# Allegro board shepard.brd
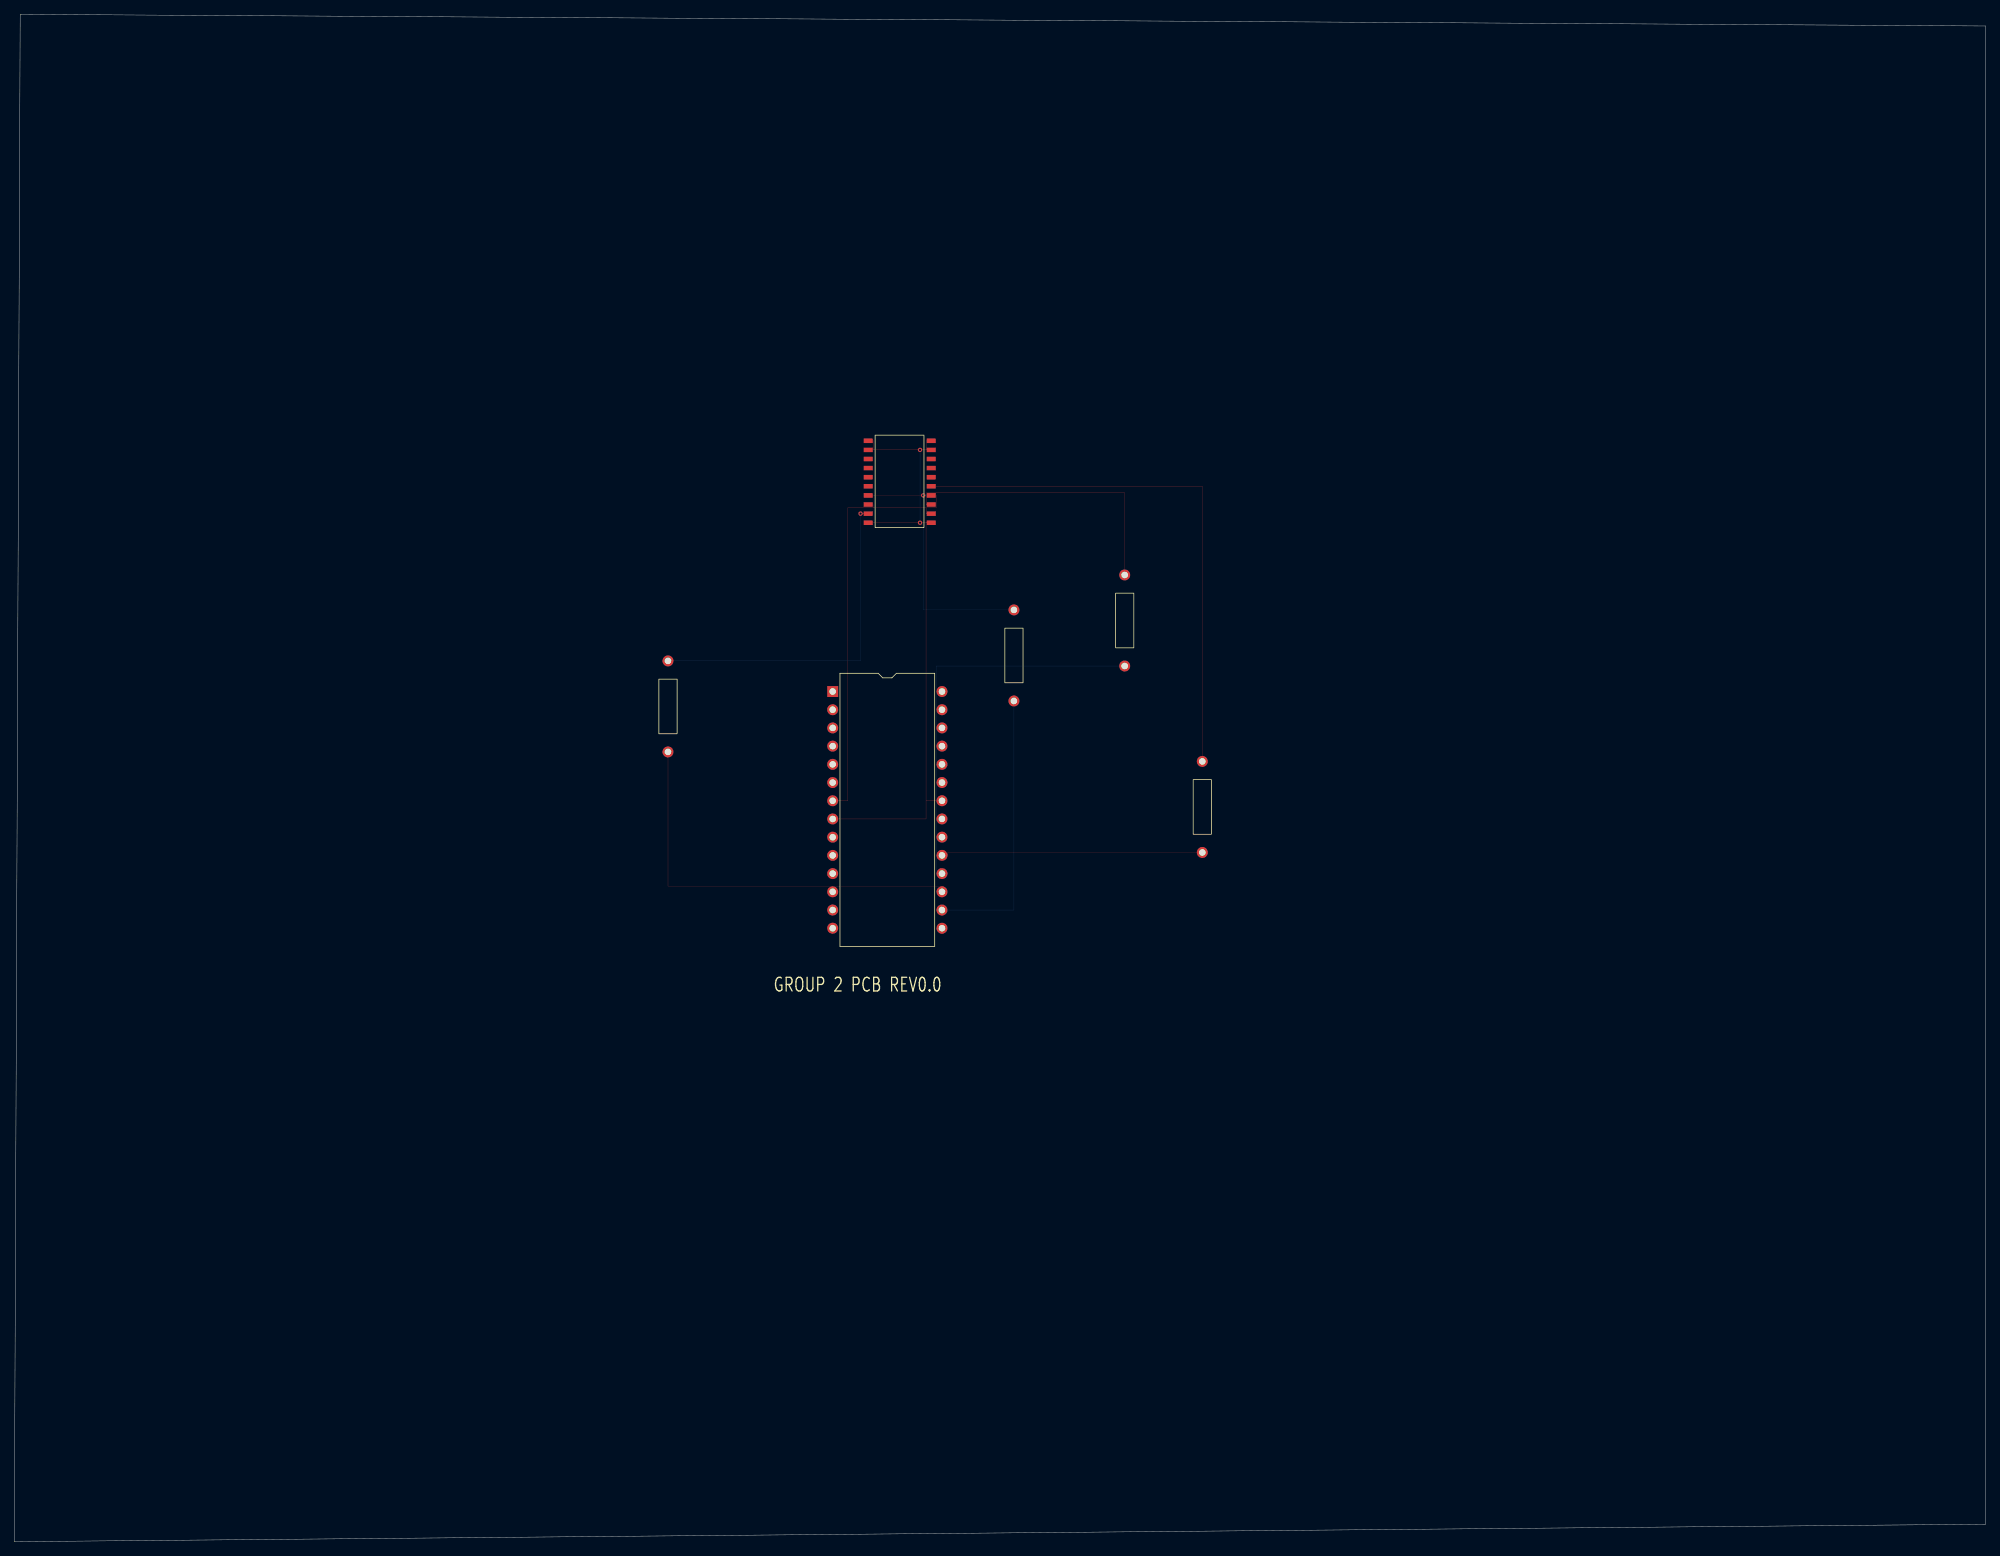
[diagram p0: board, top side]
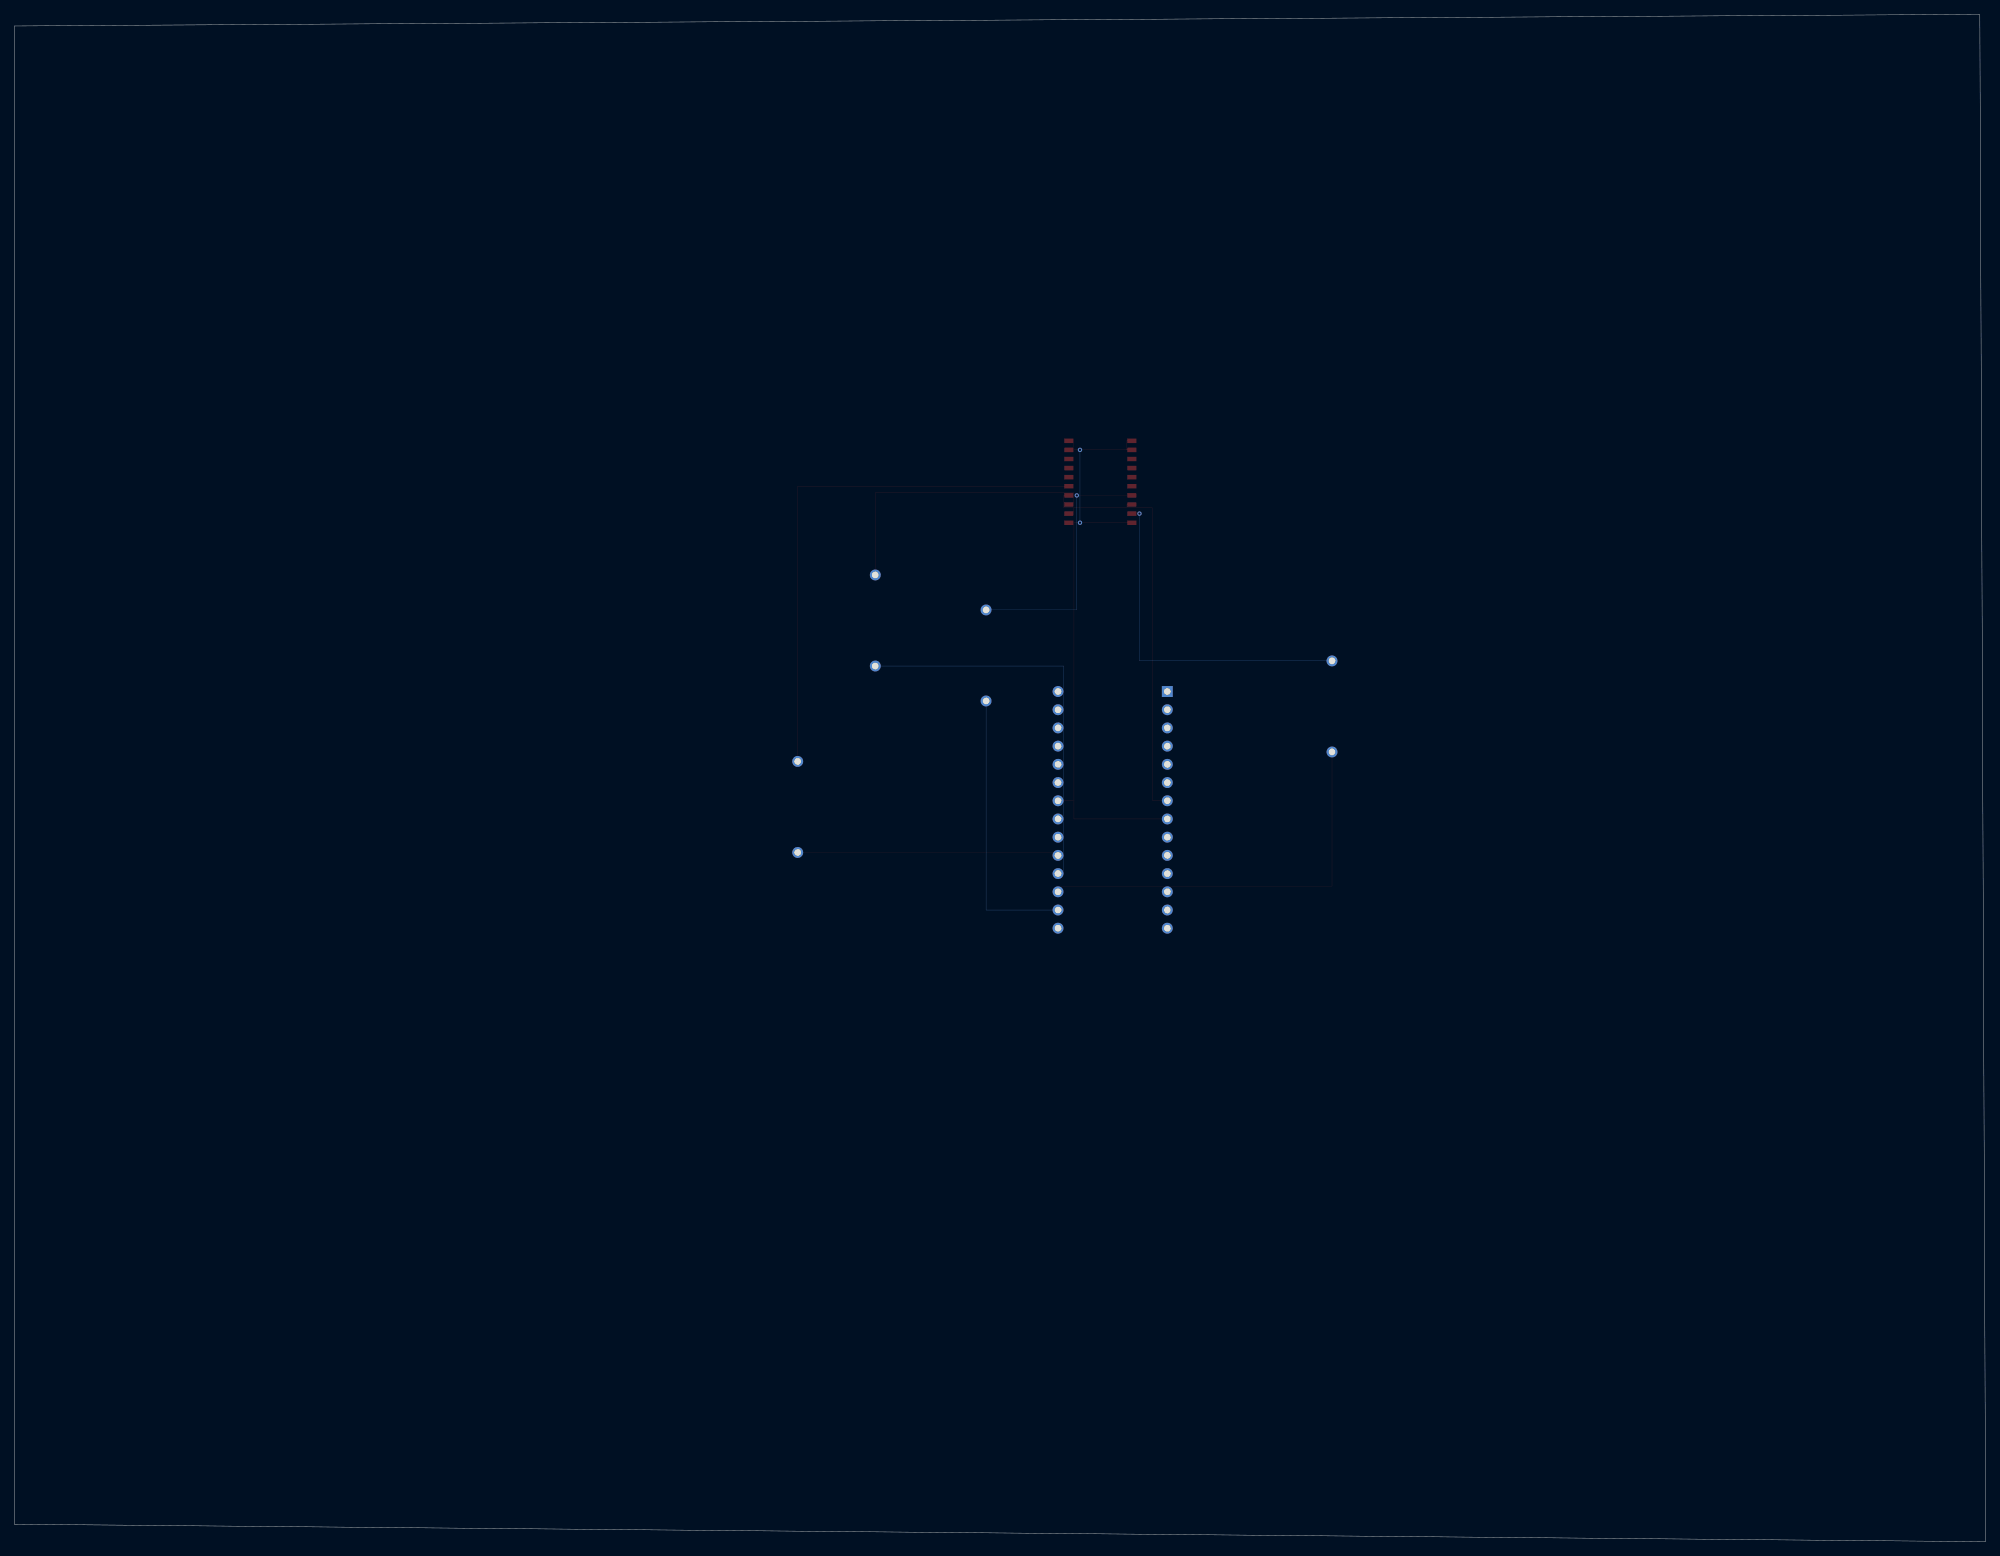
[diagram p1: board, bottom side, seen from below]

Outline 274.85 x 213.06 mm; copper layers: TOP, BOTTOM. Coordinates in mm from the lower left corner of the outline.
Outline path: 0,0 274.85,2.44 274.85,211.43 0.81,213.06 0,0

## Placement (name value [footprint] x y rotation side)
J1  DIPSOC-14x2  [DIP28]  114.1 118.59 0 top
R9  5K  [RES500]  139.37 129.97 0 top
R10  5K  [RES500]  91.14 122.86 0 top
R11  5K  [RES500]  154.81 134.85 0 top
R12  5K  [RES500]  165.63 108.84 0 top
U2  L298/SO  [SOIC20]  119.05 153.57 0 top

## Library data of the parts
J1 = DIPSOC-14x2: Tolerance: ***; User Part Number: ***
R9-R12 = RESISTOR_0: Tolerance: ***; User Part Number: ***
U2 = L298/SO_2: Tolerance: ***; User Part Number: ***

## Footprints (pads in the part's own frame, mm; a bottom-side part is the same pattern mirrored in y, then rotated)
DIP28
  rect 1.524x1.524 hole 0.914: 1(0,0)
  round 1.524 hole 0.914: 2(0,-2.54) 3(0,-5.08) 4(0,-7.62) 5(0,-10.16) 6(0,-12.7) 7(0,-15.24) 8(0,-17.78) 9(0,-20.32) 10(0,-22.86) 11(0,-25.4) 12(0,-27.94) 13(0,-30.48) 14(0,-33.02) 15(15.24,-33.02) 16(15.24,-30.48) 17(15.24,-27.94) 18(15.24,-25.4) 19(15.24,-22.86) 20(15.24,-20.32) 21(15.24,-17.78) 22(15.24,-15.24) 23(15.24,-12.7) 24(15.24,-10.16) 25(15.24,-7.62) 26(15.24,-5.08) 27(15.24,-2.54) 28(15.24,0)
RES500
  round 1.524 hole 0.914: 1(0,-12.7) 2(0,0)
SOIC20
  rect 1.27x0.635 smd: 1(0,0) 2(0,-1.27) 3(0,-2.54) 4(0,-3.81) 5(0,-5.08) 6(0,-6.35) 7(0,-7.62) 8(0,-8.89) 9(0,-10.16) 10(0,-11.43) 11(8.788,-11.43) 12(8.788,-10.16) 13(8.788,-8.89) 14(8.788,-7.62) 15(8.788,-6.35) 16(8.788,-5.08) 17(8.788,-3.81) 18(8.788,-2.54) 19(8.788,-1.27) 20(8.788,0)

## Nets
GND: J1.8 J1.22 U2.1(GND#1) U2.2(SENA) U2.10(GND#10) U2.11(GND#11) U2.19(SENB) U2.20(GND#20)
VCC: J1.7 U2.8(ENA) U2.12(VSS) U2.14(ENB)
PORT AOUT1: U2.4(OUT1)
PORT AOUT2: U2.5(OUT2)
PORT BOUT1: U2.16(OUT3)
PORT BOUT2: U2.17(OUT4)
VSUPPLY: U2.6(VS)
N01760: R9.2 U2.7(IN1)
N03446: R11.2 U2.13(IN3)
N03459: R12.2 U2.15(IN4)
N03503: J1.19 R12.1
N03641: J1.16 R9.1
N03654: J1.17 R10.1
N03672: J1.18 R11.1
N04843: R10.2 U2.9(IN2)

Pads without a net: J1 1 2 3 4 5 6 9 10 11 12 13 14 15 20 21 23 24 25 26 27 28; U2 3 18

## Via types
v1: diameter 0.61, hole 0.33, TOP to BOTTOM, 4 vias

## Routing (per net, layer and track width the routed paths; a pad name or vN(x,y) marks a point on that pad's centre or on a via; arc(x,y) is an arc through that point)
GND: length 88.2
  TOP w0.025: 127.11,142.14 v1(126.28,142.14) U2.10 ; 127.11,142.14 127.11,103.35 ; 127.11,142.14 U2.11 ; 119.77,152.3 119.77,153.57 U2.1 ; 119.77,152.3 U2.2 ; 119.77,152.3 v1(126.28,152.3) 127.17,152.3 ; 127.17,152.3 127.17,153.57 U2.20 ; 127.17,152.3 U2.19 ; J1.22 127.11,103.35 ; 127.11,103.35 127.11,100.81 J1.8
  BOTTOM w0.025: v1(126.28,142.14) v1(126.28,152.3)
VCC: length 60.4
  TOP w0.025: U2.12 127.17,143.41 127.17,144.23 ; U2.8 119.72,144.68 119.72,144.23 ; 127.17,144.23 119.72,144.23 ; 127.17,144.23 128.56,144.23 128.56,145.95 U2.14 ; 119.72,144.23 116.22,144.23 116.22,103.35 J1.7
N01760: length 36.3
  TOP w0.025: U2.7 v1(126.72,145.95)
  BOTTOM w0.025: R9.2 126.72,129.97 v1(126.72,145.95)
N03446: length 41.4
  TOP w0.025: U2.13 127.17,144.68 127.17,146.3 154.81,146.3 R11.2
N03459: length 76.2
  TOP w0.025: U2.15 165.63,147.22 R12.2
N03503: length 36.7
  TOP w0.025: R12.1 130.14,96.14 130.14,95.73 J1.19
N03641: length 39.2
  BOTTOM w0.025: J1.16 139.37,88.11 R9.1
N03654: length 57.7
  TOP w0.025: J1.17 129.34,91.45 91.14,91.45 R10.1
N03672: length 56
  BOTTOM w0.025: J1.18 128.54,93.19 128.54,122.15 R11.1
N04843: length 48.5
  TOP w0.025: U2.9 v1(117.98,143.41)
  BOTTOM w0.025: R10.2 117.98,122.86 v1(117.98,143.41)

## Text on the board
Ref Des/Silkscreen Top: GROUP 2 PCB REV0.0
